# Altium PCB 384X_PWMMOD.PcbDoc
Units mm, origin at the board's own origin, x right, y up, seen from the top; angles counter-clockwise.
Board outline 42 x 16.5 mm, 2 copper layers (Top Layer, Bottom Layer), stack 1.571 mm thick; 28 components, 22 nets, 80 pads, 0 vias.
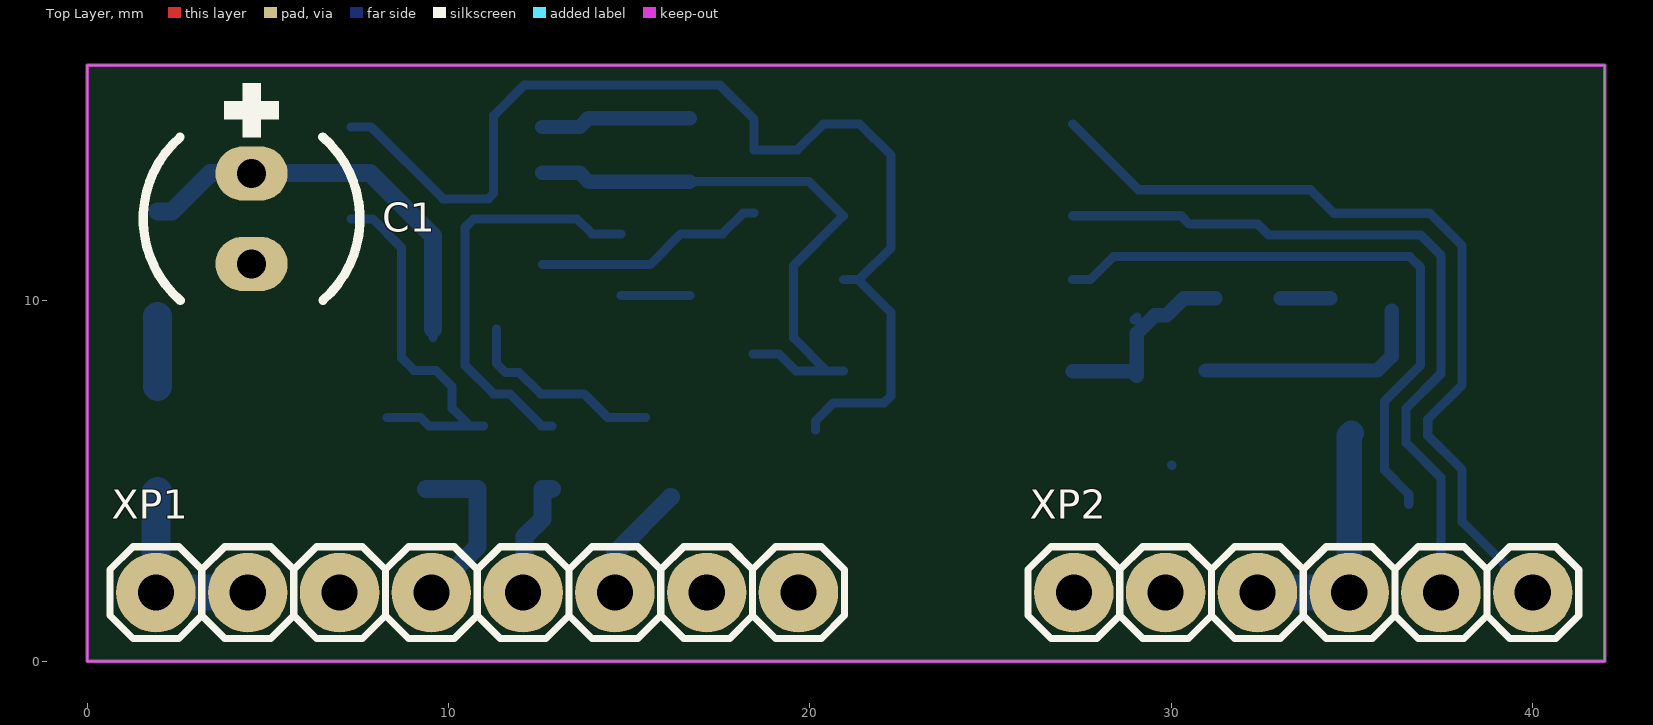
[diagram p0: Top Layer view]
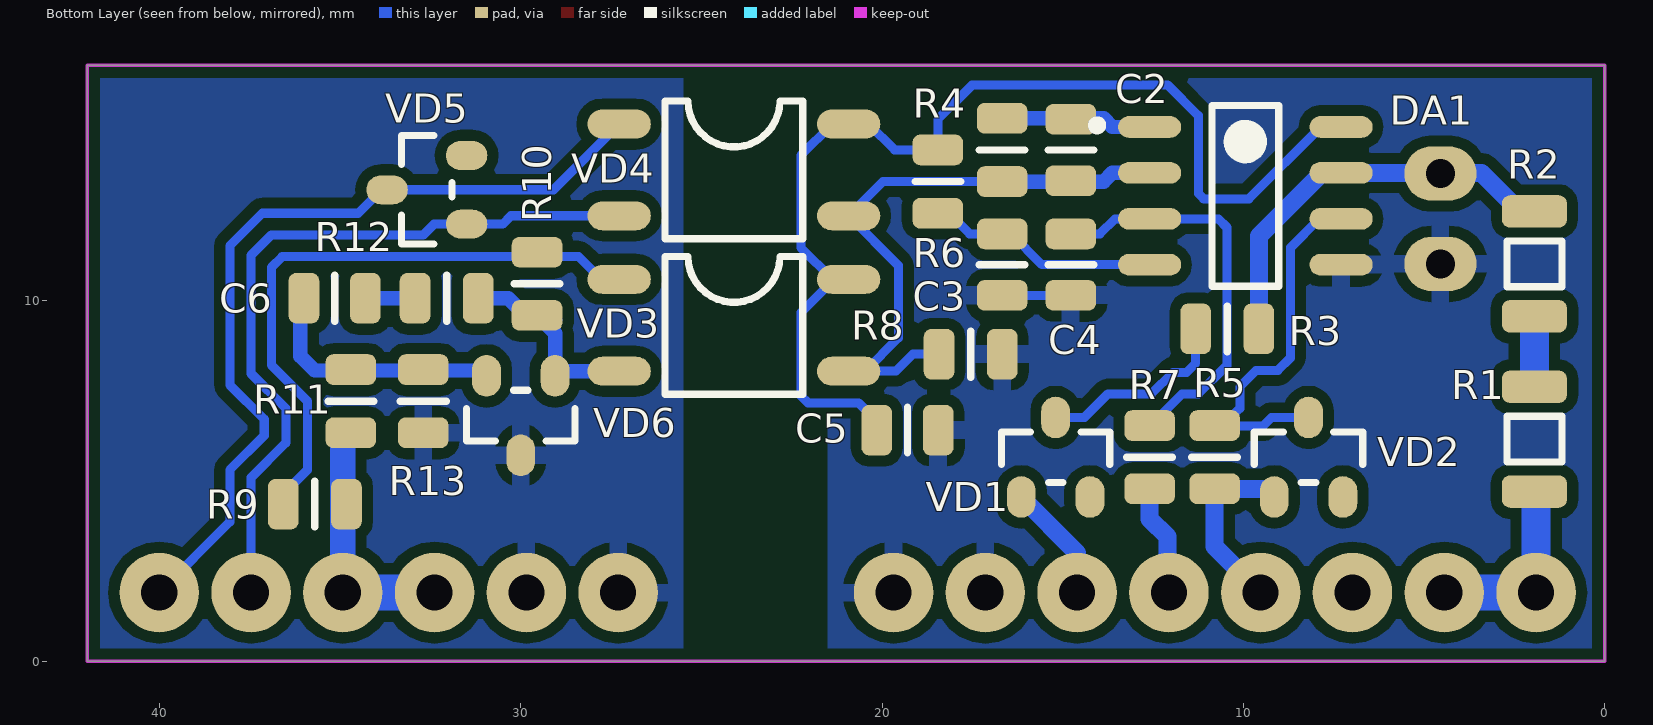
[diagram p1: Bottom Layer view, seen from below]
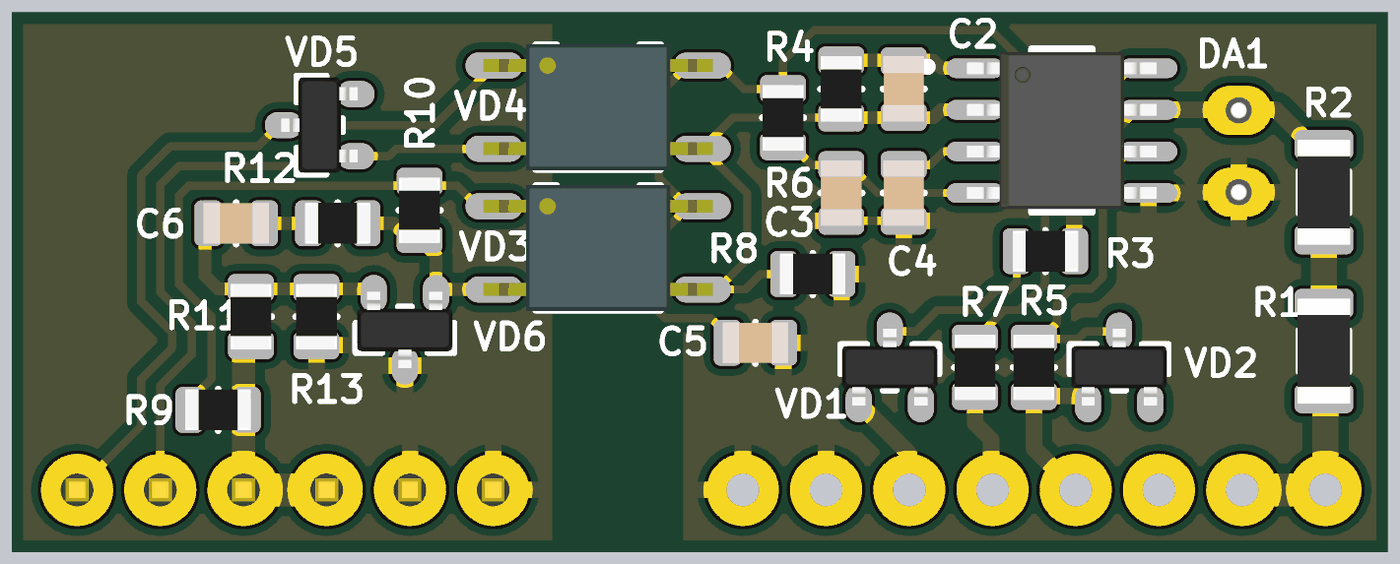
[diagram p2: 3D render of the assembled board from below, using the file's embedded part models]

## Layer stack, top to bottom
Top Solder: solder mask 0.0102, Solder Resist, Dk 3.5
Top Layer: signal copper 0.0356
Dielectric 1: dielectric 1.5, FR-4, Dk 4.8
Bottom Layer: signal copper 0.0356
Bottom Solder: solder mask 0.0102, Solder Resist, Dk 3.5

## Board outline
0,0 0,16.5 42,16.5 42,0

## Design rules (kind name [scope] priority, off if disabled: settings)
Clearance [All] p1: gap=0.3
PlaneConnect [All] p1: planeconnectstyle=Relief reliefexpansion=0.508 reliefentries=4 reliefconductorwidth=0.4 reliefairgap=0.3
PolygonConnect [All] p1: connectstyle=Relief reliefconductorwidth=0.5 reliefentries=4 polygonreliefangle="90 Angle" airgapwidth=0.3
RoutingVias [All] p1: holewidth=0.711 width=1.27 viastyle="Through Hole" minholewidth=0.711 minwidth=1.27 maxholewidth=0.711 maxwidth=1.27
SolderMaskExpansion [All] p1: expansion=0.102
Width [All] p1: maxlimit=2 minlimit=0.2 preferedwidth=0.3
28 further rules are at their usual default settings.

## Components (designator, comment, footprint, x,y, rotation, side; value= is the part's Value field where it differs from the comment)
C1 "100uF" CAP_EL_06_11_VERT 4.55,12.25 r90 top
C2 "1nF" CAP0805R 14.775,14.153 r90 bottom
C3 "1nF" CAP0805R 16.68,10.978 r90 bottom
C4 "330pF" CAP0805R 14.775,10.978 r90 bottom
C5 "100nF" CAP0805R 19.3,6.4 r0 bottom
C6 "1nF" CAP0805R 35.15,10.05 r0 bottom
DA1 "UC3844A-D8" SOP8 9.949,12.883 r180 bottom
R1 "100k" RES1206R 1.95,6.15 r270 bottom
R2 "100k" RES1206R 1.95,11 r270 bottom
R3 "6R8" RES0805R 10.45,9.2 r0 bottom
R4 "10k" RES0805R 16.68,14.153 r90 bottom
R5 "120" RES0805R 10.8,5.65 r270 bottom
R6 "10k" RES0805R 18.458,13.278 r270 bottom
R7 "470" RES0805R 12.6,5.65 r270 bottom
R8 "10k" RES0805R 17.55,8.5 r0 bottom
R9 "1k5" RES0805R 35.7,4.35 r180 bottom
R10 "1k" RES0805R 29.55,10.45 r90 bottom
R11 "47k" RES0805R 34.7,7.2 r270 bottom
R12 "47k" RES0805R 32.05,10.05 r0 bottom
R13 "5k1" RES0805R 32.7,7.2 r90 bottom
VD1 "BAS16" SOT23 15.2,5.65 r90 bottom
VD2 "BAS16" SOT23 8.2,5.65 r90 bottom
VD3 "KB354NT" SOP4 24.1,9.3 r180 bottom
VD4 "KB354NT" SOP4 24.1,13.6 r180 bottom
VD5 "BAS16" SOT23 32.6,13.05 r0 bottom
VD6 "TL431AIDBZ" SOT23 30,6.8 r270 bottom
XP1 "PLS" PLS-08 10.795,1.905 r0 top
XP2 "PLS" PLS-06 33.655,1.905 r0 top

## Footprints (in the part's own frame and the unit in brackets; to place one, negate y for a bottom-side part, rotate by r counter-clockwise, add the part's x,y. Pads: shape width x height; smd on the part's side, far side on the other; paste and mask are expansions set on the pad)
CAP0805R [mm] "capacitor 0805 reflow soldering"
  rrect50% 0.85x1.4 smd: 1(-0.85,0) 2(0.85,0)
  silkscreen extent 0,-0.64 0,0.64, body extent -1,-0.62 1,0.63, height 0.61
CAP_EL_06_11_VERT [mm]
  oval 1.5x2 hole 0.8: 1(1.25,0) 2(-1.25,0)
  silkscreen extent -2.26,-3 3.75,3, body extent -3.15,-3.14 3.15,3.14, height 11.01
PLS-06 [mm]
  round 2.2 hole 1: 1(-6.35,0) 2(-3.81,0) 3(-1.27,0) 4(1.27,0) 5(3.81,0) 6(6.35,0)
  silkscreen extent -7.62,-1.27 7.62,1.27, body extent -7.62,-1.27 7.62,1.27, height 8.45
PLS-08 [mm]
  round 2.2 hole 1: 1(-8.89,0) 2(-6.35,0) 3(-3.81,0) 4(-1.27,0) 5(1.27,0) 6(3.81,0) 7(6.35,0) 8(8.89,0)
  silkscreen extent -10.16,-1.27 10.16,1.27
RES0805R [mm] "resistor 0805 reflow soldering"
  rrect50% 0.85x1.4 smd: 1(-0.875,0) 2(0.875,0)
  silkscreen extent 0,-0.64 0,0.64, body extent -1,-0.62 1,0.63, height 0.61
RES1206R [mm] "resistor 1206 reflow soldering"
  rrect50% 0.9x1.8 smd: 1(-1.45,0) 2(1.45,0)
  silkscreen extent -0.64,-0.76 0.63,0.76, body extent -1.6,-0.8 1.6,0.8, height 0.61
SOP4 [mm]
  oval 1.75x0.8 smd mask+0.1: 1(-3.175,1.27) 2(-3.175,-1.27) 3(3.175,-1.27) 4(3.175,1.27)
  silkscreen extent -1.91,-1.91 1.91,1.91, body extent -3.5,-1.92 3.5,1.93, height 2.1
SOP8 [mm] "SOP, 8-Leads"
  oval 1.75x0.6 smd mask+0.1: 1(-2.65,1.905) 2(-2.65,0.635) 3(-2.65,-0.635) 4(-2.65,-1.905) 5(2.65,-1.905) 6(2.65,-0.635) 7(2.65,0.635) 8(2.65,1.905)
  silkscreen extent -4.23,-2.5 0.92,2.5, body extent -2.9,-2.4 2.9,2.4, height 1.77
SOT23 [mm]
  oval 1.15x0.8 smd mask+0.1: 1(-1.1,0.95) 2(-1.1,-0.95) 3(1.1,0)
  silkscreen extent -0.7,-1.5 0.7,1.5, body extent -1.16,-1.46 1.18,1.46, height 1

## Part data
C1: library part "SH016M0100BZF-0611 (VERT MOUNTED)"
C2 C3 C6: library part CC0805_1NF_50V_5%_X7R, "SMD 0805 Capacitor"
C4: library part CC0805_330PF_50V_5%_NP0, "SMD 0805 Capacitor"
C5: library part CC0805_100NF_50V_10%_X7R, "SMD 0805 Capacitor"
R1 R2: library part R1206_100K_1%_0.25W_100PPM
R3: library part R0805_6R8_1%_0.125W_200PPM
R4 R8: library part R0805_10K_1%_0.125W_100PPM
R5: library part R0805_120R_1%_0.125W_100PPM
R6: library part R0805_10K_0.1%_0.1W_10PPM
R7: library part R0805_470R_1%_0.125W_100PPM
R9: library part R0805_1K5_1%_0.125W_100PPM
R10: library part R0805_1K_1%_0.125W_100PPM
R11 R12: library part R0805_47K_1%_0.125W_100PPM
R13: library part R0805_5K1_1%_0.125W_100PPM
VD1: "Shottky Diode"
XP1: library part PLS-08
XP2: library part PLS-06

## Nets (pads, with @x,y where several pads share a name; then routed paths per layer and width w, separated by ;. In a path a pad name is that pad's centre, name@x,y a point inside that pad or via, vN(x,y) a via of type N, cw(c..) or ccw(c..) an arc to the next point about the centre after c; other vN are vias at no path point)
+HVCC: R1.2 XP1.1 XP1.2 | length 5.4
  Bottom Layer w0.5: XP1.2@4.445,1.834 XP1.2@4.488,1.834
  Bottom Layer w0.8: XP1.1 1.905,4.655 R1.2
  Bottom Layer w1: XP1.1 XP1.2
+VBIAS: VD1.1 XP1.6 | length 3.4
  Bottom Layer w0.5: XP1.6 14.605,3.005 VD1.1 ; XP1.6@14.648,1.834 XP1.6@14.648,1.905
+VCC: R9.2 R11.2 XP2.3 XP2.4 | length 7.1
  Bottom Layer w0.254: XP2.4@34.968,1.834 34.987,1.853 XP2.4@34.987,1.905 ; R11.2@34.987,6.312 R11.2@35,6.325
  Bottom Layer w0.7: XP2.4 34.925,6.25 R11.2@34.987,6.312
  Bottom Layer w1: XP2.3 XP2.4
ENA+: VD4.1 VD5.3 XP2.6 | length 23.4
  Bottom Layer w0.254: VD4.1 29.095,13.05 VD5.3 33.85,13.05 34.5,12.4 37.15,12.4 38.05,11.5 38.05,7.65 37.1,6.7 37.1,6.25 38.05,5.3 38.05,3.86 XP2.6
ENA-: VD4.2 VD5.1 XP2.5 | length 20.8
  Bottom Layer w0.254: VD4.2 30.27,12.33 30.5,12.1 VD5.1 32.4,12.1 32.7,11.8 36.9,11.8 37.465,11.235 37.465,7.965 36.5,7 36.5,6.05 37.465,5.085 XP2.5
GATE: R5.2 VD2.1 XP1.4 | length 4.8
  Bottom Layer w0.5: VD2.1@9.375,4.775 R5.2 10.8,3.18 XP1.4
HGND: C1.2 C3.1 C4.1 C5.1 DA1.5 R8.1 XP1.7 XP1.8 | length 1.9
  Bottom Layer w0.25: C4.1 C3.1
ISEN: R7.2 XP1.5 | length 3.4
  Bottom Layer w0.5: XP1.5@12.108,1.834 12.108,3.45 12.6,3.942 R7.2@12.6,4.7 ; R7.2 R7.2@12.6,4.7 ; R7.2@12.87,4.769 12.669,4.769 R7.2@12.6,4.7
NetC1_1: C1.1 DA1.7 R2.1 R3.1 | length 11.6
  Bottom Layer w0.25: R3.1@9.568,8.96 R3.1@9.568,9.2
  Bottom Layer w0.5: R2.1 2.35,12.45 3.418,13.518 DA1.7 7.832,13.518 9.575,11.775 R3.1
NetC2_1: C2.1 DA1.2 R4.1 R8.2 VD3.3 VD4.3 | length 17.2
  Bottom Layer w0.25: R4.1 19.977,13.278 VD4.3 19.55,10.955 19.55,8.95 20.47,8.03 VD3.3 19.62,8.03 19.15,8.5 R8.2
  Bottom Layer w0.4: DA1.2 13.632,13.518 13.872,13.278 R4.1
NetC2_2: C2.2 DA1.1 R4.2 | length 4.2
  Bottom Layer w0.4: DA1.1 13.632,14.788 13.872,15.028 R4.2
NetC3_2: C3.2 DA1.4 R6.2 | length 6.4
  Bottom Layer w0.25: DA1.4 15.578,10.978 16.428,11.828 17.578,11.828 18.153,12.403 R6.2
NetC4_2: C4.2 DA1.3 R7.1 | length 11.5
  Bottom Layer w0.25: R7.1@12.87,6.519 12.581,6.519 11.7,7.4 11.25,7.4 10.457,8.193 10.457,12.007 10.698,12.248 DA1.3 13.552,12.248 13.972,11.828 C4.2
NetC5_2: C5.2 DA1.8 R6.1 VD3.4 VD4.4 | length 31.1
  Bottom Layer w0.25: DA1.8 7.862,14.788 9.85,12.8 11.1,12.8 11.25,12.95 11.25,15.1 12.1,15.95 17.508,15.95 18.458,15 R6.1 19.653,14.153 20.37,14.87 VD4.4 21.38,14.87 22.25,14 22.25,11.45 21.37,10.57 VD3.4 21.33,10.57 22.25,9.65 22.25,7.35 22.05,7.15 20.65,7.15 20.15,6.65 C5.2
NetC6_1: C6.1 R12.2 | length 1.4
  Bottom Layer w0.4: R12.2@33.025,10.05 C6.1@34.4,10.05
NetC6_2: C6.2 R11.1 R13.2 VD6.2 | length 6.6
  Bottom Layer w0.4: VD6.2@30.95,8.05 35.7,8.05 36.1,8.45 C6.2@36.1,9.7
NetDA1_6: DA1.6 R5.1 VD2.3 | length 10.6
  Bottom Layer w0.25: DA1.6 7.902,12.248 8.7,11.45 8.7,8.4 9.05,8.05 9.65,8.05 10.1,7.6 10.1,7 R5.1@10.581,6.519 ; VD2.3@8.298,6.744 9.23,6.744 9.455,6.519 R5.1@10.581,6.519 ; R5.1@10.965,6.519 R5.1@10.581,6.519
NetR1_1: R1.1 R2.2 | length 2
  Bottom Layer w0.8: R1.1 R2.2
NetR3_2: R3.2 VD1.3 | length 5.7
  Bottom Layer w0.25: R3.2 11.325,8.25 11.575,8 11.95,8 12.55,7.4 13.75,7.4 14.4,6.75 VD1.3@15.45,6.75
NetR9_1: R9.1 R10.2 VD3.1 | length 17.3
  Bottom Layer w0.254: VD3.1 27.77,10.57 28.4,11.2 36.6,11.2 36.9,10.9 36.9,8.2 35.9,7.2 35.9,5.3 36.575,4.625 R9.1
NetR10_1: R10.1 R12.1 VD3.2 VD6.1 | length 5.7
  Bottom Layer w0.254: R10.1@28.979,9.454 R10.1@29.05,9.525
  Bottom Layer w0.4: VD3.2 28.92,8.03 VD6.1 29.05,9.075 R10.1 29.875,9.575 30.35,10.05 R12.1@31.225,10.05
PGND: R13.1 VD6.3 XP2.1 XP2.2 | length 0.2
  Bottom Layer w0.254: XP2.2@29.888,1.834 XP2.2@30.015,1.961 ; VD6.3@30.015,5.433 VD6.3@30.023,5.425
pads on no net: VD1.2 VD2.2 VD5.2 XP1.3

## Polygon pours and split planes (outlines as drawn)
PGND on Bottom Layer "Top Layer-No Net" (solid, remove dead copper, pour order 4): 42,18 42,0 25.5,0 25.5,18
HGND on Bottom Layer "Top Layer-No Net" (solid, remove dead copper, pour order 2): 0,18 0,0 21.5,0 21.5,18

## Keep-outs
Keep-Out Layer:
  the board outline again, w0.1